# EAGLE board AlarmClock PCB (EAGLE 9.7.0)
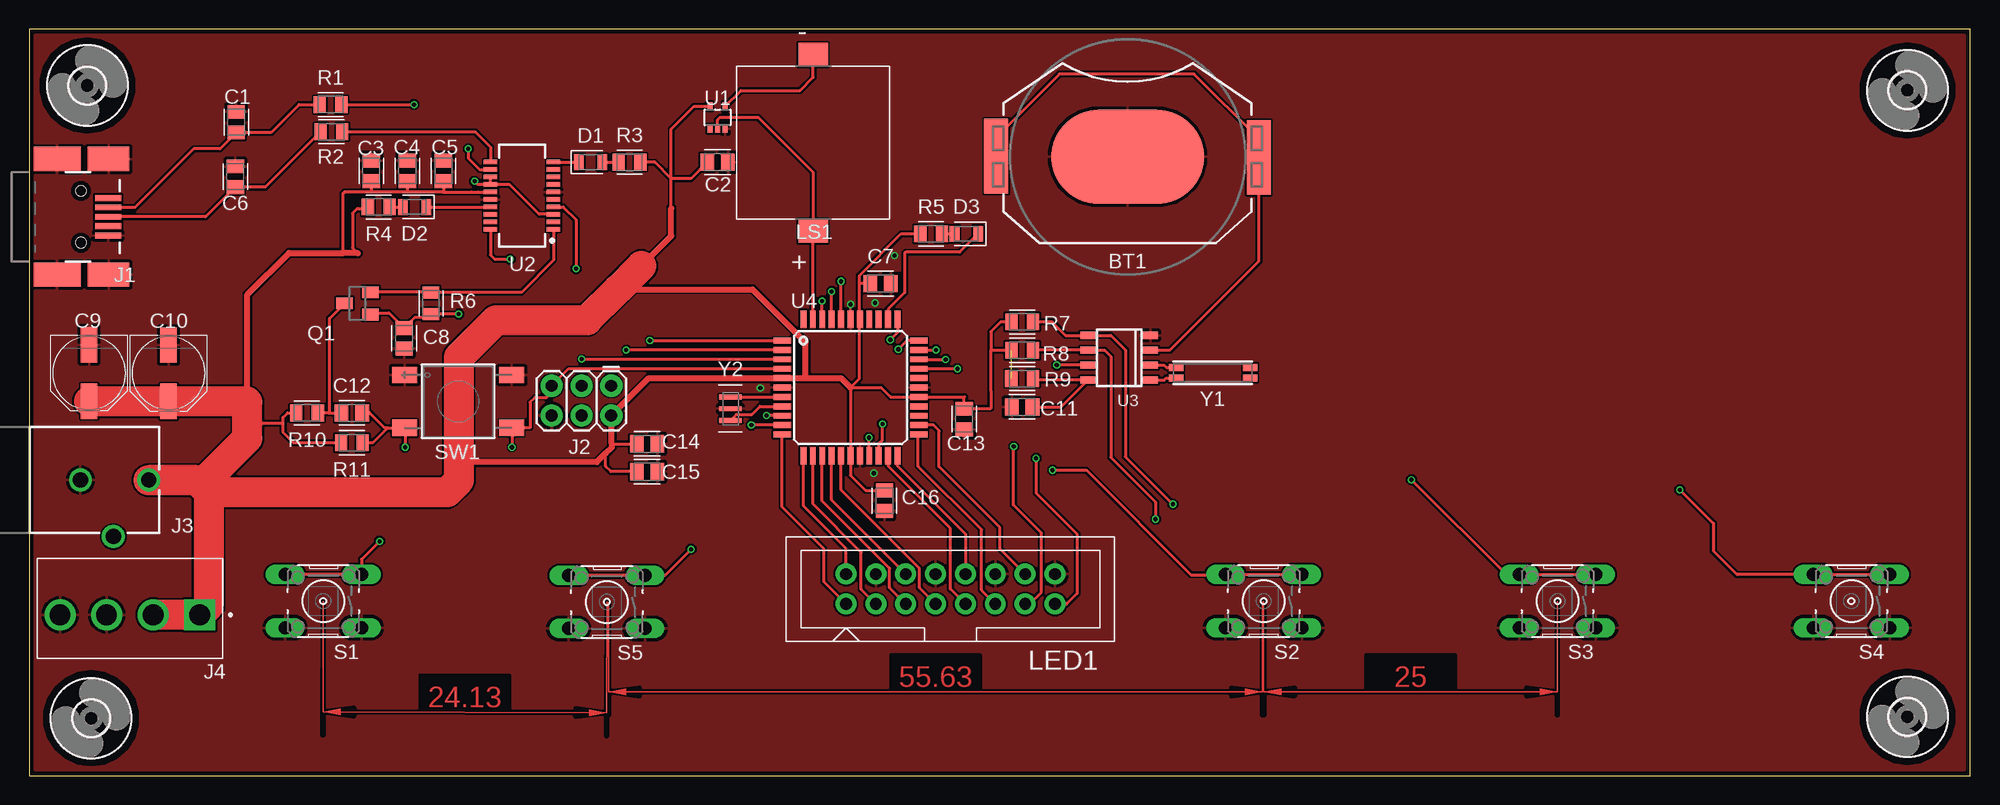
[diagram p0: board, top side]
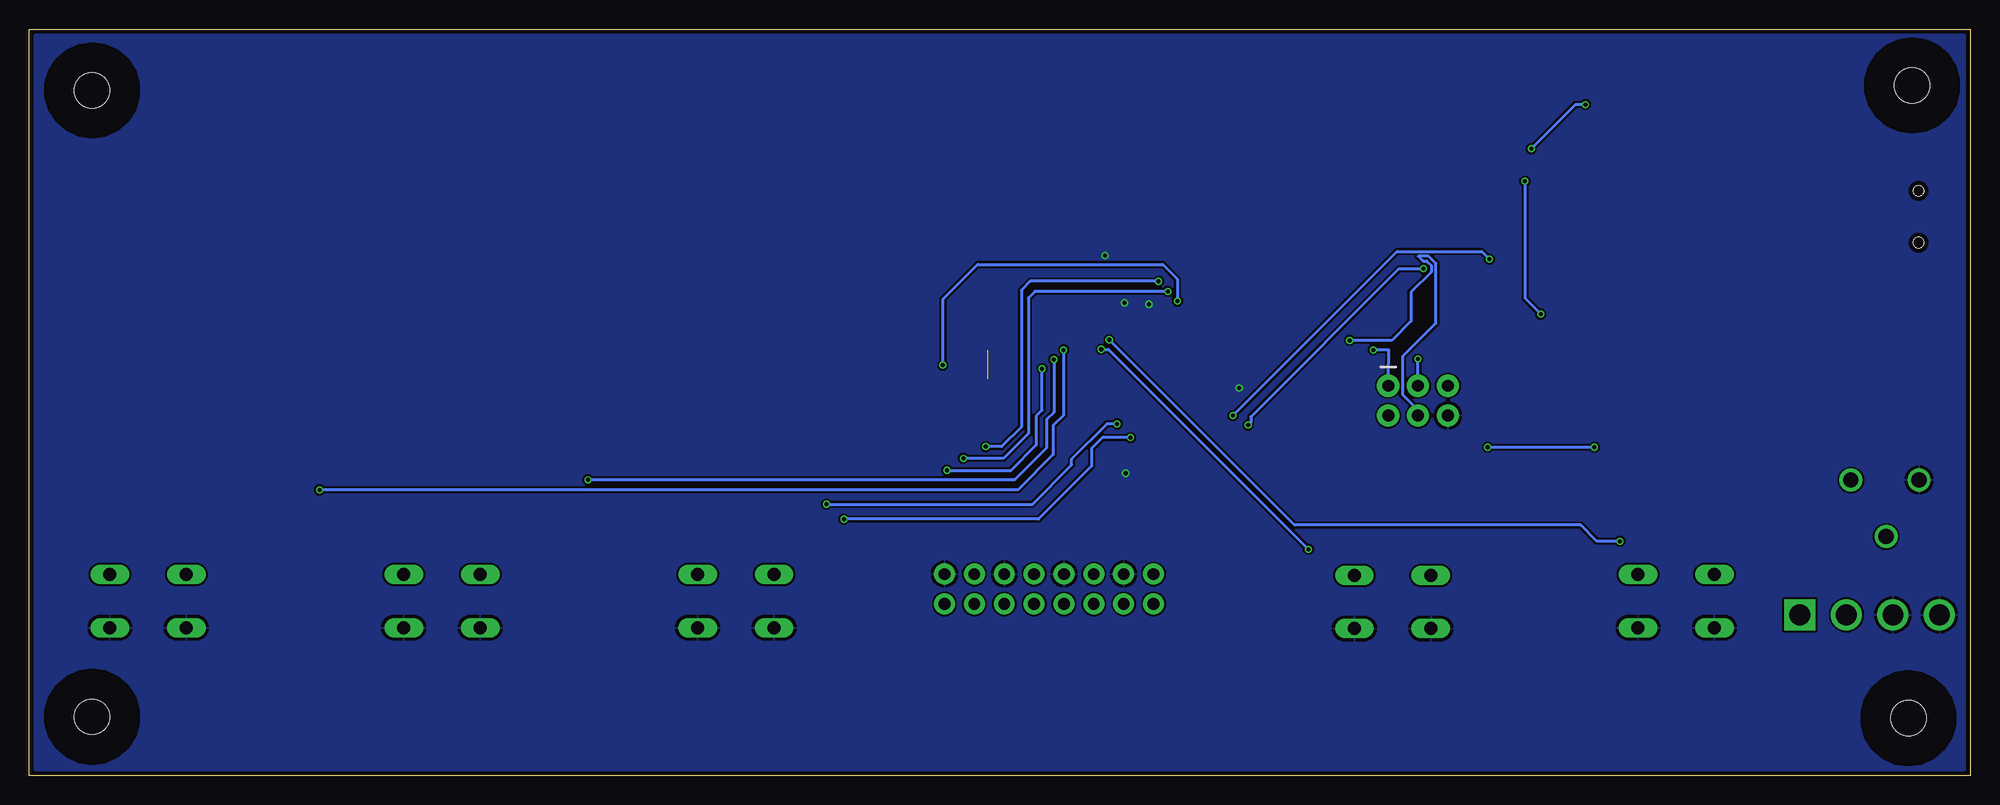
[diagram p1: board, bottom side, seen from below]

Size 165.1 x 63.5 mm. Coordinates in mm from the lower left corner, seen from the top.
Outline: 0,0 165.1,0 165.1,63.5 0,63.5 0,0
Copper layers (1*16): Top 0.035559375mm / dielectric 1.6mm / Bottom 0.035559375mm
Design rules "oshpark-2layer": minimum track width 6mil, minimum drill 10mil, track to track 6mil, track to pad 6mil, pad to pad 6mil, via to via 6mil, smd to smd 6mil, copper to edge 15mil, drill to drill 6mil, minimum pad ring 5mil, minimum via ring 5mil, stop-mask expansion 2.5mil, vias tented up to drill 0mil, thermal gap 10mil

## Footprints (pad centres in the part's own frame; a part is rotated, then mirrored left to right if it is on the bottom)
BATTCON_20MM_4LEGS = smd 13 x 8: NEGATIVE 0,0 | smd 2.032 x 3.175: POSITIVE@1 -11.176,1.651; POSITIVE@2 -11.176,-1.524; POSITIVE@3 11.176,1.524; POSITIVE@4 11.176,-1.651
CAPC2012X110 = smd 1.165 x 1.465: 1 -0.875,0; 2 0.875,0
PANASONIC_D = smd 3 x 1.4: + 2.4,0; - -2.4,0
LEDC2012X110N_R = smd 0.817 x 1.352: 1 -1,0 | smd 0.822 x 1.352: 2 0.998,0
LEDC2012X110N_G = smd 0.817 x 1.352: 1 -1,0 | smd 0.822 x 1.352: 2 0.998,0
3,0 = hole 3: 0,0
USB-MINIB = smd 2.25 x 0.5: D+ 2.325,0; D- 2.325,0.8; GND 2.325,-1.6; ID 2.325,-0.8; VBUS 2.325,1.6 | smd 4 x 2.05: S1 -2,4.925; S3 -2,-4.925 | smd 3.5 x 2.05: S2 2.35,4.925; S4 2.35,-4.925 | hole 0.9: 0,2.2; 0,-2.2
2X3 = drill 1.016 pad 1.88: 1 0,0; 2 0,2.54; 3 2.54,0; 4 2.54,2.54; 5 5.08,0; 6 5.08,2.54
POWER_JACK_PTH_BREAD = drill 1.3: GND 0,7.9; GNDBREAK 4.8,10.7; PWR 0,13.7
JST_B4P-VH(LF)(SN) = drill 1.76 pad 2.64 square: 1 -5.94,0 | drill 1.76 pad 2.64: 2 -1.98,0; 3 1.98,0; 4 5.94,0
2X08-IDC = drill 1 pad 1.778: 1 -1.27,8.89; 2 1.27,8.89; 3 -1.27,6.35; 4 1.27,6.35; 5 -1.27,3.81; 6 1.27,3.81; 7 -1.27,1.27; 8 1.27,1.27; 9 -1.27,-1.27; 10 1.27,-1.27; 11 -1.27,-3.81; 12 1.27,-3.81; 13 -1.27,-6.35; 14 1.27,-6.35; 15 -1.27,-8.89; 16 1.27,-8.89
XDCR_CPT-1625-80-SMT-TR = smd 2.5 x 2: N 0,-7.5; P 0,7.5
SOT23 = smd 1 x 1.4: 1 -0.95,-1.1; 2 0.95,-1.1; 3 0,1.1
RESC2012X65 = smd 1.031 x 1.42: 1 -0.919,0; 2 0.919,0
B3F-10XX = drill 1.1 long: 1 -3.251,2.261; 2 3.251,2.261; 3 -3.251,-2.261; 4 3.251,-2.261
SWITCH_FSM2JSMAA = smd 2.108 x 1.397: 1 -9.093,4.496; 2 0,4.496; 3 -9.093,0; 4 0,0
SOT353 = smd 0.42 x 0.7: 1 -0.65,-0.95; 2 0,-0.95; 3 0.65,-0.95; 4 0.65,0.95; 5 -0.65,0.95
SSOP20_L = smd 0.381 x 1.143: 1 -2.857,-2.68; 2 -2.223,-2.68; 3 -1.587,-2.68; 4 -0.953,-2.68; 5 -0.318,-2.68; 6 0.318,-2.68; 7 0.953,-2.68; 8 1.587,-2.68; 9 2.223,-2.68; 10 2.857,-2.68; 11 2.857,2.68; 12 2.223,2.68; 13 1.587,2.68; 14 0.953,2.68; 15 0.318,2.68; 16 -0.318,2.68; 17 -0.953,2.68; 18 -1.587,2.68; 19 -2.223,2.68; 20 -2.857,2.68
SOT96-1 = smd 0.6 x 1.3: 1 -1.905,-2.65; 2 -0.635,-2.65; 3 0.635,-2.65; 4 1.905,-2.65; 5 1.905,2.65; 6 0.635,2.65; 7 -0.635,2.65; 8 -1.905,2.65
TQFP44 = smd 1.5 x 0.5: 1 -5.8,4; 2 -5.8,3.2; 3 -5.8,2.4; 4 -5.8,1.6; 5 -5.8,0.8; 6 -5.8,0; 7 -5.8,-0.8; 8 -5.8,-1.6; 9 -5.8,-2.4; 10 -5.8,-3.2; 11 -5.8,-4; 23 5.8,-4; 24 5.8,-3.2; 25 5.8,-2.4; 26 5.8,-1.6; 27 5.8,-0.8; 28 5.8,0; 29 5.8,0.8; 30 5.8,1.6; 31 5.8,2.4; 32 5.8,3.2; 33 5.8,4 | smd 0.5 x 1.5: 12 -4,-5.8; 13 -3.2,-5.8; 14 -2.4,-5.8; 15 -1.6,-5.8; 16 -0.8,-5.8; 17 0,-5.8; 18 0.8,-5.8; 19 1.6,-5.8; 20 2.4,-5.8; 21 3.2,-5.8; 22 4,-5.8; 34 4,5.8; 35 3.2,5.8; 36 2.4,5.8; 37 1.6,5.8; 38 0.8,5.8; 39 0,5.8; 40 -0.8,5.8; 41 -1.6,5.8; 42 -2.4,5.8; 43 -3.2,5.8; 44 -4,5.8
CRYSTAL-SMD-MC-146 = smd 1.2 x 0.6: NC1 6.9,1.2; NC2 6.9,0.3; P$1 0.6,0.3; P$2 0.6,1.2
CSTNE_3SMD = smd 0.4 x 1.9: 1 -1,0; 2 0,0; 3 1,0

## Placement (x,y rotation side)
BT1  [BATTCON_20MM_4LEGS]  93.42,52.65 180 top
C1  47 pF  [CAPC2012X110]  17.6,55.6 90 top
C2  0.1uF  [CAPC2012X110]  58.55,52.2 0 top
C3  4.7uF  [CAPC2012X110]  29.09,51.46 90 top
C4  0.1uF  [CAPC2012X110]  32.16,51.46 90 top
C5  0.1uF  [CAPC2012X110]  35.22,51.46 90 top
C6  47 pF  [CAPC2012X110]  17.53,50.95 90 top
C7  0.1uF  [CAPC2012X110]  72.42,41.87 0 top
C8  0.1uF  [CAPC2012X110]  31.88,37.21 270 top
C9  47uF  [PANASONIC_D]  5.08,34.25 270 top
C10  47uF  [PANASONIC_D]  11.85,34.24 270 top
C11  3.3 uF  [CAPC2012X110]  84.45,31.37 180 top
C12  0.1 uF  [CAPC2012X110]  27.43,30.86 0 top
C13  0.1uF  [CAPC2012X110]  79.53,30.33 270 top
C14  0.1uF  [CAPC2012X110]  52.55,28.23 0 top
C15  4.7uF  [CAPC2012X110]  52.55,25.86 0 top
C16  0.1uF  [CAPC2012X110]  72.74,23.39 270 top
D1  TX (R)  [LEDC2012X110N_R]  47.75,52.2 0 top
D2  RX (G)  [LEDC2012X110N_G]  32.77,48.39 180 top
D3  USER  [LEDC2012X110N_R]  79.7,46.1 180 top
H1  MOUNT-HOLE3.0  [3,0]  4.92,58.72 0 top
H2  MOUNT-HOLE3.0  [3,0]  159.76,58.32 0 top
H3  MOUNT-HOLE3.0  [3,0]  159.76,5 0 top
H4  MOUNT-HOLE3.0  [3,0]  5.25,4.87 0 top
J1  USB Mini-B  [USB-MINIB]  4.38,47.55 0 top
J2  AVR ISP  [2X3]  49.5,33.17 180 top
J3  POWER  [POWER_JACK_PTH_BREAD]  -3.56,25.15 270 top
J4  DISPLAY POWER  [JST_B4P-VH(LF)(SN)]  8.55,13.67 180 top
LED1  HUB75MATRIX  [2X08-IDC]  78.36,15.88 90 top
LS1  Speaker  [XDCR_CPT-1625-80-SMT-TR]  66.67,53.85 180 top
Q1  BSS123  [SOT23]  27.91,40.18 90 top
R1  27  [RESC2012X65]  25.63,57.1 0 top
R2  27  [RESC2012X65]  25.7,54.79 0 top
R3  330  [RESC2012X65]  51.05,52.2 0 top
R4  330  [RESC2012X65]  29.72,48.39 180 top
R5  10k  [RESC2012X65]  76.71,46.1 0 top
R6  10k  [RESC2012X65]  34.16,40.18 270 top
R7  10k  [RESC2012X65]  84.45,38.61 180 top
R8  10k  [RESC2012X65]  84.45,36.19 180 top
R9  1k  [RESC2012X65]  84.45,33.78 180 top
R10  10k  [RESC2012X65]  23.62,30.86 180 top
R11  10k  [RESC2012X65]  27.43,28.32 180 top
S1  Snooze2  [B3F-10XX]  25,14.84 180 top
S2  Mode  [B3F-10XX]  105,14.84 180 top
S3  Hour  [B3F-10XX]  130,14.84 180 top
S4  MINUTE  [B3F-10XX]  155,14.84 180 top
S5  Snooze1  [B3F-10XX]  49.13,14.77 180 top
SW1  FSM2JSMAA  [SWITCH_FSM2JSMAA]  41.02,29.59 0 top
U1  74HC1G04  [SOT353]  58.55,56.01 0 top
U2  FT231XS  [SSOP20_L]  41.91,49.35 90 top
U3  PCF8523T  [SOT96-1]  92.71,35.56 90 top
U4  ATMEGA644A  [TQFP44]  69.85,33.02 0 top
Y1  32.768kHz  [CRYSTAL-SMD-MC-146]  96.96,33.53 0 top
Y2  16Mhz  [CSTNE_3SMD]  59.63,31.22 270 top

## Library data of the parts
BT1 = SparkFun-Batteries; PROD_ID: BATT-10373; SF_SKU: PRT-11892
C1-C8 C11-C16 = Capacitor; CATEGORY: Capacitor
C9 C10 = SparkFun-Capacitors; PROD_ID: CAP-08478
D1 D3 = Opto-Electronic; CATEGORY: Opto-Electronic; COLOR: RED; SUB-CATEGORY: LED
D2 = Opto-Electronic; CATEGORY: Opto-Electronic; COLOR: RX (G); SUB-CATEGORY: LED
H1-H4 = holes
J1 = CE4100; PROD_ID: CONN-08193; SF_ID: PRT-00587
J2 = SparkFun-Connectors
J3 = SparkFun-Connectors; PROD_ID: PRT-10811
J4 = B4P-VH_LF__SN_; MANUFACTURER: JST Sales; MAXIMUM_PACKAGE_HEIGHT: 10.9mm; STANDARD: Manufacturer Recommendations
LED1 = adafruit
LS1 = CPT-1625-80-SMT-TR; CUI_PURCHASE_URL: https://www.cuidevices.com/product/audio/buzzers/audio-transducers/cpt-1625-80-smt-tr?utm_source=snapeda.com&utm_medium=referral&utm_campaign=snapedaBOM; DESCRIPTION: 16.8 mm, 5 Vp-p, 80 dB, Surface Mount (SMT), Piezo Audio Transducer Buzzer; DIGI-KEY_PART_NUMBER: 102-CPT-1625-80-SMT-CT-ND; MF: CUI Devices; MP: CPT-1625-80-SMT-TR; PACKAGE: CUI Devices; PURCHASE-URL: https://pricing.snapeda.com/search/part/CPT-1625-80-SMT-TR/?ref=eda
Q1 = Transistor; CATEGORY: Transistor; DESCRIPTION: MOSFET N-CH 100V 0.17A SOT-23; DRAIN_CURRENT: 170mA; MANUFACTURER: ON Semiconductor; MPN: BSS123L; OPERATING_TEMP: -55°C ~ 150°C; PART_STATUS: Active; ROHS_COMPLIANT: Yes; SUB-CATEGORY: MOSFET; THERMALLOSS: 360mW; TYPE: N-Channel
R1-R11 = Resistor; CATEGORY: Resistor; SUB-CATEGORY: Fixed
S1-S5 = B3F-1052; DESCRIPTION: Tactile Switch; DIGI-KEY_PART_NUMBER: 39-B3F-1052-G-ND; MF: Omron; MP: B3F-1052; PACKAGE: None; PURCHASE-URL: https://pricing.snapeda.com/search/part/B3F-1052/?ref=eda
SW1 = CE4100; MANUFACTURER_PART_NUMBER: FSM2JSMAA; RESET: RESET; VENDOR: Tyco Electronics
U1 = SparkFun-IC-Logic; PROD_ID: COMP-08268
U2 = SparkFun-IC-Comms; PROD_ID: IC-11524
U3 = nxp_60
U4 = atmel; MPN: ATMEGA644PV-10AU; OC_FARNELL: 1455123; OC_NEWARK: 58M3748
Y1 = SparkFun-Clocks; PROD_ID: XTAL-09342
Y2 = RESONATOR; FREQUENCY: 16Mhz

## Nets
ALARM_INT: U3.7 U4.42
GND: BT1.NEGATIVE C1.2 C2.2 C3.2 C4.2 C5.2 C6.2 C7.2 C8.2 C9.- C10.- C11.2 C13.2 C14.2 C15.2 C16.2 J1.GND J1.S1 J1.S2 J1.S3 J1.S4 J2.6 J3.GND J4.3 J4.4 LED1.4 LED1.8 LED1.12 LED1.16 S1.1 S1.2 S2.1 S2.2 S3.1 S3.2 S4.1 S4.2 S5.1 S5.2 SW1.1 SW1.2 U1.3 U2.6 U2.16 U3.4 U4.6 U4.18 U4.28 U4.39 Y2.2
N$1: R1.2 U2.12
N$2: R2.2 U2.11
N$3: C8.1 Q1.1 R6.2 U2.3 U2.13 U2.14
N$4: C6.1 J1.D+ R2.1
N$5: C1.1 J1.D- R1.1
N$6: Q1.2 R6.1 U2.1
N$7: D2.2 R4.1
N$8: U4.7 Y2.1
N$9: D2.1 U2.17
N$10: D1.1 U2.10
N$11: C12.1 Q1.3 R10.1
N$12: S2.3 S2.4 U4.30
N$13: U4.8 Y2.3
N$14: D1.2 R3.1
N$15: C11.1 R9.1 U3.8
N$16: BT1.POSITIVE@1 BT1.POSITIVE@2 BT1.POSITIVE@3 BT1.POSITIVE@4 U3.3
N$17: U3.1 Y1.P$1
N$18: U3.2 Y1.P$2
N$19: J2.1 U4.2
N$20: J2.3 U4.3
N$21: J2.4 U4.1
N$22: D3.2 R5.2
N$23: LED1.1 U4.11
N$24: D3.1 U4.35
N$25: LED1.3 U4.13
N$26: LED1.5 U4.14
N$27: LED1.7 U4.16
N$28: LED1.9 U4.21
N$29: LED1.11 U4.23
N$30: LED1.13 U4.40
N$31: LED1.15 U4.41
N$32: LED1.2 U4.12
N$33: LED1.6 U4.15
N$34: LED1.14 U4.24
N$35: LED1.10 U4.22
N$36: LS1.N U1.4
N$37: LS1.P U1.2 U4.43
N$38: S5.3 S5.4 U4.33
N$39: S3.3 S3.4 U4.31
N$40: S4.3 S4.4 U4.32
N$41: S1.3 S1.4 U4.34
RESET: C12.2 J2.5 R11.1 SW1.3 SW1.4 U4.4
RXD: U2.20 U4.9
SCL: R8.1 U3.6 U4.19
SDA: R7.1 U3.5 U4.20
TXD: U2.4 U4.10
VBUS: J1.VBUS
VCC: C2.1 C3.1 C4.1 C5.1 C7.1 C9.+ C10.+ C13.1 C14.1 C15.1 C16.1 J2.2 J3.PWR J4.1 J4.2 R3.2 R4.2 R5.1 R7.2 R8.2 R9.2 R10.2 R11.2 U1.5 U2.15 U4.5 U4.17 U4.27 U4.38

## Tracks (layer width: path | path; a pad name or v marks a point on that pad's centre or on a via)
ALARM_INT  (via drill 0.35)
  Top 0.254: v67.44,40.39 67.44,38.83 U4.42 | U3.7 v87.4,34.92
  Bottom 0.254: v67.44,40.39 67.44,42.24 68.68,43.48 84.43,43.48 87.38,40.54 87.38,34.95 v87.4,34.92
GND  (via drill 0.35)
  Top 0.152: U4.39 v69.85,40.1
  other vias: 71.83,25.73 62.18,32.99 71.93,40.23 73.58,44.25
  pour Top: -1.27,66.04 -1.27,-2.54 166.37,-2.54 167.64,-1.27 167.64,66.04
  pour Bottom: -5.08,67.31 -5.08,-3.81 -3.81,-5.08 170.18,-5.08 171.45,-3.81 171.45,67.31
N$1  (via drill 0.35)
  Top 0.254: U2.12 38.3,51.57 37.34,52.53 v37.34,53.34 | R1.2 v32.72,57.1
  Bottom 0.254: v32.72,57.1 33.58,57.1 v37.34,53.34
N$2
  Top 0.254: U2.11 39.23,53.48 37.92,54.79 R2.2
N$3  (via drill 0.35)
  Top 0.254: Q1.1 29.15,39.37 30.59,39.37 C8.1 32.8,39.01 34.16,39.01 R6.2 v36.52,39.27 | U2.3 43.38,47.76 40.84,50.3 U2.14 | U2.14 U2.13 | U2.14 38.14,50.3 v37.87,50.57
  Bottom 0.254: v37.87,50.57 37.87,40.62 v36.52,39.27
N$4
  Top 0.254: R2.1 20.07,50.08 C6.1 15,47.55 J1.D+
N$5
  Top 0.254: R1.1 22.94,57.1 20.56,54.73 C1.1 16.22,53.34 13.97,53.34 8.98,48.35 J1.D-
N$6
  Top 0.254: R6.1 34.14,41.12 | Q1.2 34.13,41.13 34.14,41.12 | U2.1 44.59,43.85 41.86,41.12 34.14,41.12
N$7
  Top 0.254: R4.1 D2.2
N$8
  Top 0.254: U4.7 Y2.1
N$9
  Top 0.254: D2.1 U2.17
N$10
  Top 0.254: D1.1 U2.10
N$11
  Top 0.254: 25.4,30.86 C12.1 | 25.4,30.86 R10.1 | 25.4,30.86 25.53,30.99 25.53,38.9 Q1.3
N$12  (via drill 0.35)
  Top 0.254: S2.3 S2.4 98.81,17.09 89.92,25.98 v87.05,25.98 | U4.30 v78.94,34.62 | v78.94,34.62
  Bottom 0.254: v78.94,34.62 78.94,31.09 79.45,30.58 79.45,28.12 81.64,25.93 87.05,25.93 v87.05,25.98
N$13
  Top 0.254: Y2.3 60.15,30.74 61.46,30.74 62.14,31.42 U4.8
N$14
  Top 0.254: D1.2 R3.1
N$15
  Top 0.254: R9.1 85.5,33.66 U3.8 87.77,31.37 C11.1
N$16
  Top 0.254: U3.3 97.03,36.2 104.6,43.76 BT1.POSITIVE@1 BT1.POSITIVE@2 99.08,59.69 87.63,59.69 BT1.POSITIVE@4 BT1.POSITIVE@3
N$17
  Top 0.254: Y1.P$1 96.69,33.83 96.52,33.66 U3.1
N$18
  Top 0.254: Y1.P$2 96.72,34.73 96.52,34.92 U3.2
N$19  (via drill 0.35)
  Top 0.254: U4.2 v50.77,36.22 | U4.2
  Bottom 0.254: v50.77,36.22 49.44,36.22 49.44,35.07 49.51,35.01 J2.1
N$20  (via drill 0.35)
  Top 0.254: v46.99,35.43 64.05,35.43 U4.3
  Bottom 0.254: J2.3 46.97,35.43 v46.99,35.43
N$21  (via drill 0.35)
  Top 0.254: v52.78,37.03 64.05,37.03 U4.1
  Bottom 0.254: J2.4 46.97,31.09 48.26,32.38 48.26,35.68 45.44,38.5 45.44,43.57 46.07,44.19 46.95,44.19 46.54,43.79 46.23,43.79 45.85,43.4 45.85,42.86 47.57,41.13 47.57,38.67 49.21,37.03 v52.78,37.03
N$22
  Top 0.254: R5.2 D3.2
N$23
  Top 0.254: LED1.1 67.59,16.48 67.59,19.3 64.05,22.84 U4.11
N$24
  Top 0.254: D3.1 79.13,44.53 74.55,44.53 74.46,44.44 74.46,41.1 73.05,39.69 U4.35
N$25
  Top 0.254: LED1.3 70.76,15.85 70.76,19 66.65,23.11 U4.13
N$26
  Top 0.254: U4.14 67.45,23.36 73.18,17.63 73.18,15.98 LED1.5
N$27
  Top 0.254: LED1.7 75.72,15.98 75.72,17.63 69.05,24.3 U4.16
N$28
  Top 0.254: LED1.9 78.36,15.88 78.36,21.02 73.05,26.33 U4.21
N$29
  Top 0.254: LED1.11 81,15.77 81,20.93 75.62,26.31 75.62,28.99 U4.23
N$30  (via drill 0.35)
  Top 0.254: U4.40 69.04,38.83 v69.04,42.06 | LED1.13 85.09,14.61 86.08,15.6 86.08,20.65 83.72,23.01 83.72,27.96 v83.74,27.99
  Bottom 0.254: v69.04,42.06 79.96,42.06 80.72,41.3 80.72,29.67 82.4,27.99 v83.74,27.99
N$31  (via drill 0.35)
  Top 0.254: U4.41 v68.25,41.2 | v68.25,41.2 | v85.65,27 85.65,24.03 89.13,20.55 89.13,15.49 88.24,14.61 LED1.15
  Bottom 0.254: v68.25,41.2 79.55,41.2 80.11,40.64 80.11,29.12 82.23,27 v85.65,27
N$32
  Top 0.254: U4.12 65.85,22.95 69.47,19.33 LED1.2
N$33
  Top 0.254: LED1.6 68.25,23.44 U4.15
N$34
  Top 0.254: LED1.14 82.55,19.3 82.55,21.11 77.37,26.29 77.37,29.26 77.42,29.31 76.91,29.82 U4.24
N$35
  Top 0.254: U4.22 73.85,26.36 79.63,20.58 LED1.10
N$36
  Top 0.254: LS1.N 66.67,59.41 65.56,58.29 60.53,58.29 U1.4
N$37
  Top 0.254: U4.43 66.65,46.32 LS1.P 66.67,51.33 62,56.01 58.75,56.01 58.55,55.8 U1.2
N$38  (via drill 0.35)
  Top 0.254: S5.4 S5.3 54.06,17.03 v56.29,19.25 | U4.33 74.66,37.02 v73.91,36.27
  Bottom 0.254: v73.91,36.27 73.3,36.27 v56.29,19.25
N$39  (via drill 0.35)
  Top 0.254: U4.31 v77.94,35.42 v77.95,35.41 | S3.3 S3.4 125.65,17.1 v117.58,25.17
  Bottom 0.254: v77.95,35.41 77.95,30.91 78.56,30.3 78.56,27.89 81.28,25.17 v117.58,25.17
N$40  (via drill 0.35)
  Top 0.254: U4.32 | U4.32 v77.11,36.22 | S4.3 S4.4 145.26,17.1 143.26,19.1 143.26,21.46 v140.41,24.31
  Bottom 0.254: v77.11,36.22 77.11,30.66 78,29.77 78,27.3 81,24.31 v140.41,24.31
N$41  (via drill 0.35)
  Top 0.254: S1.4 S1.3 28.25,18.4 v29.79,19.94 | U4.34 73.85,37.7 v73.23,37.08
  Bottom 0.254: v29.79,19.94 31.75,19.94 33.12,21.31 57.47,21.31 v73.23,37.08
RESET  (via drill 0.35)
  Top 0.254: 30.48,29.59 SW1.3 31.95,29.57 v31.95,27.94 | 30.48,29.59 30.23,29.59 28.96,30.86 C12.2 | 30.48,29.59 29.21,28.32 R11.1 | U4.4 45.87,34.62 J2.5 44.42,32.61 43.99,32.18 43,32.18 42.6,31.77 42.6,29.59 SW1.4 41.05,29.57 v41.05,27.94
  Bottom 0.254: v31.95,27.94 v41.05,27.94
RXD  (via drill 0.35)
  Top 0.254: U4.9 64.04,30.63 v62.71,30.63 | U2.20 39.23,44.31 39.6,43.94 v40.89,43.94
  Bottom 0.254: v62.71,30.63 48.74,44.6 41.55,44.6 v40.89,43.94
SCL  (via drill 0.35)
  Top 0.254: R8.1 U3.6 91.47,36.2 92,35.66 92,27.08 95.81,23.27 v95.81,21.82 | U4.19 71.42,27.25 v71.42,28.75
  Bottom 0.254: v95.81,21.82 79.25,21.82 74.73,26.34 74.73,27.84 73.81,28.75 v71.42,28.75
SDA  (via drill 0.35)
  Top 0.254: R7.1 87,38.61 88.14,37.47 U3.5 92,37.47 93.24,36.22 93.24,27.13 v97.28,23.09 | U4.20 72.25,28.21 72.57,28.52 v72.57,29.92
  Bottom 0.254: v97.28,23.09 79.78,23.09 76.43,26.44 76.43,26.92 73.43,29.92 v72.57,29.92
TXD  (via drill 0.35)
  Top 0.254: U2.4 45.41,48.39 46.51,47.3 v46.51,43.13 | U4.10 v61.42,29.82
  Bottom 0.254: v46.51,43.13 48.58,43.13 61.2,30.51 61.2,30.04 v61.42,29.82
VCC  (1 unrouted)
  Top 0.254: R11.2 22.48,28.32 21.59,29.21 21.59,29.97 | 21.59,29.97 21.59,30.48 21.97,30.86 R10.2 | 49.53,30.61 J2.2 | R4.2 28.67,48.26 27.89,48.26 27.48,47.85 27.48,44.91 27.94,44.45 | 35.15,49.66 32.13,49.66 | 32.13,49.66 29.08,49.66 | 29.08,49.66 26.8,49.66 26.67,49.53 26.67,44.45 | C5.1 35.22,49.73 35.15,49.66 | C4.1 32.16,49.69 32.13,49.66 | C3.1 29.09,49.67 29.08,49.66 | 70.61,38.86 70.61,41.91 | 70.61,41.91 70.61,42.55 74.17,46.1 R5.1 | 70.61,38.86 U4.38 | C15.1 49.48,25.86 49.02,26.31 49.02,27.43 | 69.85,33.02 72.47,33.02 73.27,32.22 U4.27 79.55,32.22 79.53,32.2 C13.1 79.57,31.24 81.79,31.24 81.79,32.73 81.79,36.2 | 69.85,33.02 70.61,33.78 70.61,38.86 | 69.85,33.02 U4.17 69.85,25.55 71.13,24.27 C16.1 | C7.1 70.65,41.87 70.61,41.91 | C14.1 49.54,28.23 49.53,28.25 | 54.61,48.28 54.61,50.8 | 54.61,50.8 53.21,52.2 R3.2 | C2.1 56.27,50.8 54.61,50.8 | U1.5 56.55,56.96 54.61,55.02 54.61,50.8 | 35.15,49.66 37.59,49.66 37.6,49.66 38.14,49.66 38.15,49.66 U2.15 | 21.59,29.97 18.54,29.97 | R7.2 82.63,38.61 81.79,37.77 81.79,36.2 | R8.2 81.8,36.19 81.79,36.2
  Top 0.508: 49.53,30.61 49.53,28.25 49.53,27.94 49.02,27.43 48.26,26.67 36.55,26.67 | J2.2 52.69,33.82 U4.5 66.04,33.82 | 66.04,33.82 69.05,33.82 69.85,33.02 | 66.04,33.82 66.04,36.85 61.52,41.38 50.06,41.38 | 18.54,31.75 18.54,40.92 22.1,44.48 26.64,44.48 26.67,44.45 27.94,44.45 | 52.05,43.36 54.61,45.92 54.61,48.28
  Top 2.54: 15.24,25.4 14.99,25.15 J3.PWR 14.22,25.15 15.24,24.13 35.56,24.13 36.55,25.12 36.55,26.67 36.55,35.61 39.7,38.76 47.45,38.76 50.06,41.38 52.05,43.36 | 15.24,25.4 18.54,28.7 18.54,29.97 18.54,31.75 18.45,31.84 C10.+ 5.09,31.84 C9.+ | 15.24,25.4 15.24,14.42 J4.1 J4.2
(copper drawn outside any net)
  shapes: Top area x3